# EAGLE board riffleBoost3Vand5V (EAGLE 6.5.0)

Size 27.61 x 16.5 mm. Coordinates in mm from the lower left corner, seen from the top.
Outline: 0,0 27.61,0 27.61,16.5 0,16.5 0,0
Copper layers (1*16): Top 0.035mm / dielectric 1.5mm / Bottom 0.035mm
Design rules "default": minimum track width 10mil, minimum drill 24mil, track to track 8mil, track to pad 8mil, pad to pad 8mil, via to via 8mil, smd to smd 8mil, copper to edge 40mil, drill to drill 8mil, minimum pad ring 10mil, minimum via ring 8mil, stop-mask expansion 4mil, vias tented up to drill 0mil, thermal gap 10mil
Net classes: 0 Default: width 0.203 mm; 1 power: width 0.406 mm, clearance 0.203 mm

## Footprints (pad centres in the part's own frame; a part is rotated, then mirrored left to right if it is on the bottom)
C0805 = smd 1.3 x 1.5: 1 -0.85,0; 2 0.85,0
TSOT23-6 = smd 0.62 x 1.22: 1 -0.95,-1.3; 2 0,-1.3; 3 0.95,-1.3; 4 0.95,1.3; 5 0,1.3; 6 -0.95,1.3
1X02 = drill 1.016 pad 1.88: 1 0,0; 2 2.54,0
JST-2-SMD = smd 1 x 4.6: 1 -1,-3.7; 2 1,-3.7 | smd 1.6 x 3.4: NC1 -3.4,1.5; NC2 3.4,1.5
INDUCTOR_D30 = smd 1.4 x 3: P$1 -1.1,0; P$2 1.1,0
1X02_NO_SILK = drill 1.016 pad 1.88: 1 0,0; 2 2.54,0
SWITCH-SPDT-SMD = smd 1.2 x 2.5: 1 -2.5,-2.75; 2 0,-2.75; 3 2.5,-2.75 | hole 0.9: -3.55,0; 3.55,0
R0805 = smd 1.3 x 1.5: 1 -0.95,0; 2 0.95,0

## Placement (x,y rotation side)
C11  10uF  [C0805]  19.05,5.08 0 top
C12  10uF  [C0805]  19.05,8.89 0 top
C14  10uF  [C0805]  11.43,13.97 270 top
IC2  MCP1640  [TSOT23-6]  15.24,13.97 90 top
IN1  [1X02]  1.27,3.81 270 top
IN2  [JST-2-SMD]  3.81,11.43 90 top
L1  10uH  [INDUCTOR_D30]  13.97,8.89 0 top
OUT  [1X02_NO_SILK]  5.08,5.08 0 top
POWER  SPDT  [SWITCH-SPDT-SMD]  26.67,5.08 270 top
RB3  390K  [R0805]  15.24,3.81 90 top
RB5  215K  [R0805]  11.43,2.54 90 top
RT  680K  [R0805]  19.05,2.54 180 top
VOL1  Vol Sel  [SWITCH-SPDT-SMD]  22.86,15.24 0 top

## Library data of the parts
C11 C12 C14 = resistor
IC2 L1 = linear-technology
IN1 IN2 OUT POWER VOL1 = SparkFun
RB3 RB5 RT = rcl

## Nets
GND [power]: C11.2 C12.2 C14.2 IC2.2 IN1.1 IN2.1 OUT.1 VOL1.2
N$2: IC2.4 RB3.2 RB5.2 RT.1
N$18: RB5.1 VOL1.1
N$19: RB3.1 VOL1.3
N$26 [power]: IC2.1 L1.P$2
PWR [power]: C12.1 IC2.3 IC2.6 L1.P$1 POWER.3
VBATT: IN1.2 IN2.2 POWER.2
VCC: C11.1 C14.1 IC2.5 OUT.2 RT.2

## Tracks (layer width: path | path; a pad name or v marks a point on that pad's centre or on a via)
GND  (7 unrouted)
N$2  (3 unrouted)
N$18  (1 unrouted)
N$19  (1 unrouted)
N$26  (1 unrouted)
PWR  (4 unrouted)
VBATT  (2 unrouted)
VCC  (4 unrouted)